# EAGLE board RoverMeter (EAGLE 6.4)
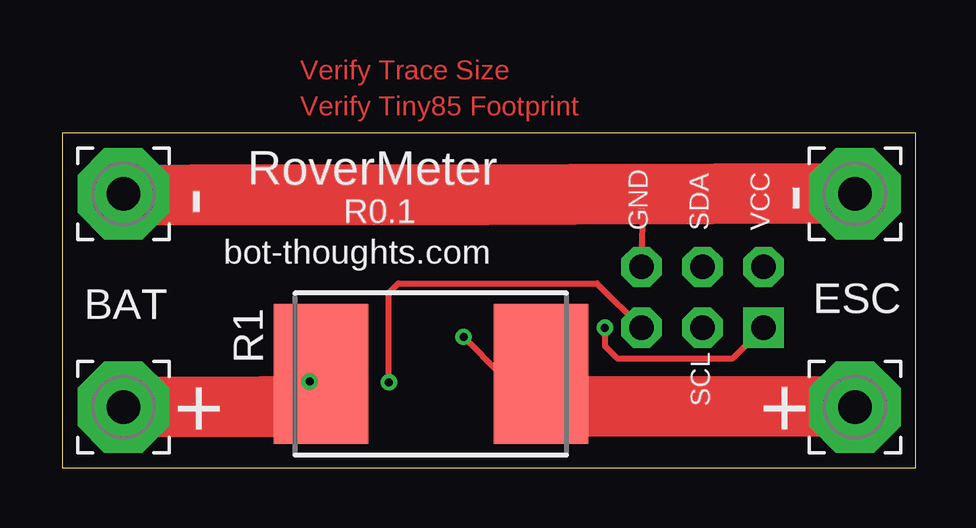
[diagram p0: board, top side]
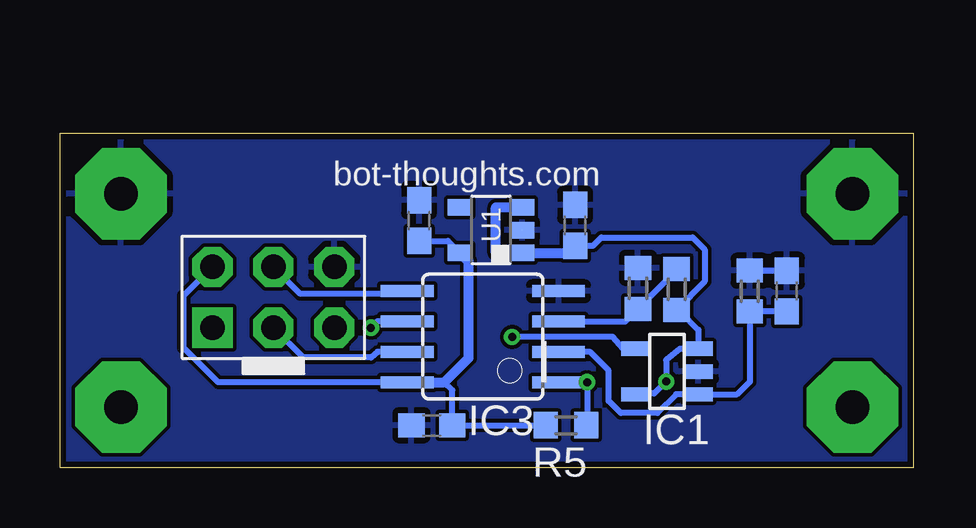
[diagram p1: board, bottom side, seen from below]

Size 35.56 x 13.97 mm. Coordinates in mm from the lower left corner, seen from the top.
Outline: 35.56,0 35.56,13.97 0,13.97 0,0 35.56,0
Copper layers (1*16): Top 0.0356mm / dielectric 1.5011mm / Bottom 0.0356mm
Design rules "LaenPCBOrder *": minimum track width 6mil, minimum drill 13mil, track to track 6mil, track to pad 6mil, pad to pad 6mil, via to via 6mil, smd to smd 6mil, copper to edge 10mil, drill to drill 6mil, minimum pad ring 7mil, minimum via ring 7mil, stop-mask expansion 4mil, vias tented up to drill 0mil, thermal gap 10mil

## Footprints (pad centres in the part's own frame; a part is rotated, then mirrored left to right if it is on the bottom)
C0603 = smd 1.1 x 1: 1 -0.85,0; 2 0.85,0
SOT23-5 = smd 0.6 x 1.2: 1 -0.95,-1.306; 2 0,-1.306; 3 0.95,-1.306; 4 0.95,1.306; 5 -0.95,1.306
SOIC8 = smd 0.5 x 2.2: 1 -1.905,-3.154; 2 -0.645,-3.154; 3 0.625,-3.154; 4 1.895,-3.154; 5 1.905,3.154; 6 0.635,3.154; 7 -0.635,3.154; 8 -1.905,3.154
CON6P2R = drill 1.016 pad 1.676 square: 1 -2.54,-1.27 | drill 1.016 pad 1.676 octagon: 2 -2.54,1.27; 3 0,-1.27; 4 0,1.27; 5 2.54,-1.27; 6 2.54,1.27
3,81/1,4 = drill 1.397 pad 3.81 octagon: 1 0,0
R4527 = smd 3.94 x 5.84: 1 -4.575,0; 2 4.575,0
R0603 = smd 1 x 1.1: 1 -0.85,0; 2 0.85,0
SOT23-5' = smd 0.69 x 0.99: 1 -0.95,-1.3; 2 0,-1.3; 3 0.95,-1.3; 4 0.95,1.3; 5 -0.95,1.3

## Placement (x,y rotation side)
C1  104  [C0603]  5.27,7.37 90 bottom
C2  104  [C0603]  20.07,1.78 180 bottom
C3  105  [C0603]  20.6,10.32 90 bottom
C4  105  [C0603]  14.1,10.12 90 bottom
IC1  INA168  [SOT23-5]  10.27,4.02 90 bottom
IC3  TINY85  [SOIC8]  17.94,5.48 90 bottom
J1  AVRISP  [CON6P2R]  26.67,7.11 0 bottom
PAD1  BAT_V  [3,81/1,4]  2.54,2.54 0 top
PAD2  BAT_G  [3,81/1,4]  2.54,11.43 0 top
PAD3  ESC_V  [3,81/1,4]  33.02,2.54 0 top
PAD4  ESC_G  [3,81/1,4]  33.02,11.43 0 top
R1  0.001  [R4527]  15.36,3.92 0 top
R2  68k  [R0603]  6.82,7.37 270 bottom
R3  51K  [R0603]  9.87,7.45 270 bottom
R4  33K  [R0603]  11.48,7.49 270 bottom
R5  10K  [R0603]  14.48,1.78 180 bottom
U1  MCP1824  [SOT23-5']  17.6,9.92 90 bottom

## Library data of the parts
C1 R3-R5 = resistor
C2-C4 R1 R2 = rcl
IC1 = burr-brown; MF: TEXAS INSTRUMENTS; MPN: INA168NA/250; OC_FARNELL: 4375737; OC_NEWARK: 35C1744
IC3 J1 = bt_avr
PAD1-PAD4 = wirepad
U1 = bt_regulator

## Nets
5V: C2.1 C3.1 IC3.8 J1.2 R5.2 U1.5
!RESET: IC3.1 J1.5 R5.1
AMP: C1.1 IC1.1 IC3.2 R2.2
GND: C1.2 C2.2 C3.2 C4.2 IC1.2 IC3.4 J1.6 PAD2.1 PAD4.1 R2.1 R4.1 U1.2
MISO: IC3.6 J1.1
N$4: IC1.4 PAD3.1 R1.2
SCL: IC3.7 J1.3
SDA: IC3.5 J1.4
V+: C4.1 IC1.3 IC1.5 PAD1.1 R1.1 R3.2 U1.1 U1.3
VOLT: IC3.3 R3.1 R4.2

## Tracks (layer width: path | path; a pad name or v marks a point on that pad's centre or on a via)
5V
  Bottom 0.254: J1.2 30.4,7.19 30.4,5 28.97,3.57 IC3.8 | C3.1 19.4,9.47 U1.5 | 19.54,3.57 19.22,3.24 C2.1 R5.2
  Bottom 0.406: IC3.8 19.54,3.57 18.54,4.57 18.54,8.64 18.87,8.97 U1.5
!RESET  (via drill 0.33)
  Top 0.254: v13.6,3.57 13.6,7.3 14,7.7 22.27,7.7 J1.5
  Bottom 0.254: IC3.1 v13.6,3.57 13.6,1.81 R5.1
AMP
  Bottom 0.254: C1.1 R2.2 6.82,3.6 7.35,3.07 IC1.1 9.89,3.07 10.67,2.29 12.19,2.29 12.7,2.79 12.7,4.06 13.46,4.83 IC3.2
GND
  Top 0.254: 21.25,11.4 24.01,11.4 24.16,11.25 J1.6
  Top 0.406: 17.6,11.39
  Top 2.54: PAD4.1 21.25,11.4 17.6,11.39 15.78,11.38 5.47,11.38 2.44,11.36 PAD2.1
  Bottom 0.254: R2.1 C1.2
  pour Bottom: 0,13.97 35.56,13.97 35.56,0 0,0 0,13.72
MISO  (via drill 0.33)
  Top 0.254: v22.61,5.84 22.61,5.08 23.11,4.57 27.94,4.57 J1.1
  Bottom 0.254: IC3.6 22.34,6.11 v22.61,5.84
N$4  (via drill 0.33)
  Top 0.254: v16.72,5.46 18.27,3.89 R1.2
  Top 2.54: PAD3.1 20.02,2.56 R1.2
  Bottom 0.254: IC1.4 12.09,4.97 12.54,5.46 v16.72,5.46
SCL
  Bottom 0.254: IC3.7 22.32,4.84 22.59,4.6 25.43,4.6 J1.3
SDA
  Bottom 0.254: IC3.5 22.07,7.38 22.19,7.25 25.54,7.25 J1.4
V+  (via drill 0.33)
  Top 0.254: R1.1 v10.3,3.6
  Top 2.54: PAD1.1 8.35,2.56 9.43,2.56 R1.1
  Bottom 0.254: 11.9,3.07 IC1.5 11.5,3.1 10.8,3.1 v10.3,3.6 10.3,4.5 9.73,4.97 IC1.3 8.96,5.76 9.7,6.5 R3.2 8.7,7.76 8.7,9.12 9.2,9.62 13,9.62 13.35,9.27 C4.1
  Bottom 0.406: C4.1 14.4,8.97 U1.1 17.4,8.97 17.4,10.87 U1.3
VOLT
  Bottom 0.254: R3.1 9.87,8.25 R4.2 12.01,6.1 IC3.3

## Text on the board
Top: Verify Trace Size | Verify Tiny85 Footprint
tNames: RoverMeter | - | - | R0.1 | GND | SDA | VCC | bot-thoughts.com | ESC | BAT | SCL | + | +
bNames: bot-thoughts.com | I